# EAGLE board EURO (EAGLE 5.10)
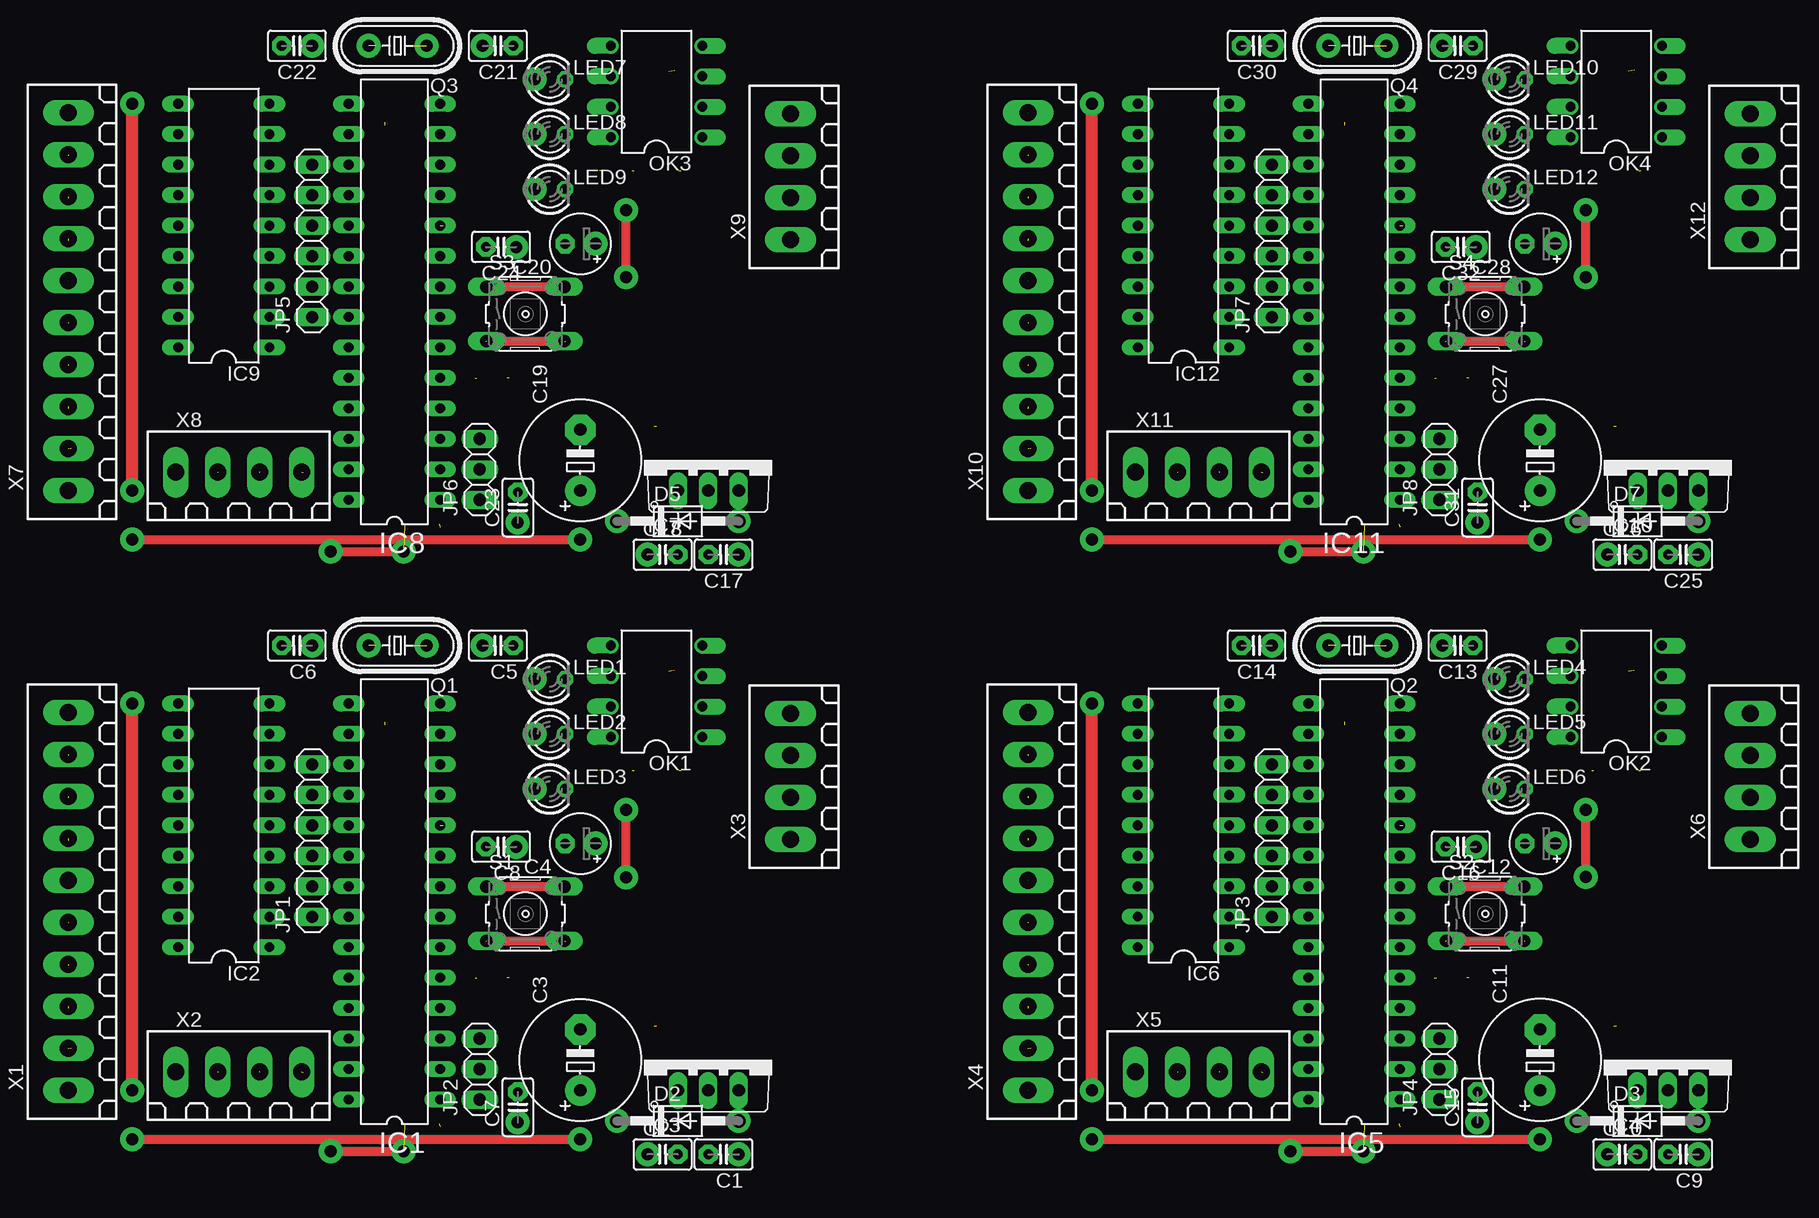
[diagram p0: board, top side]
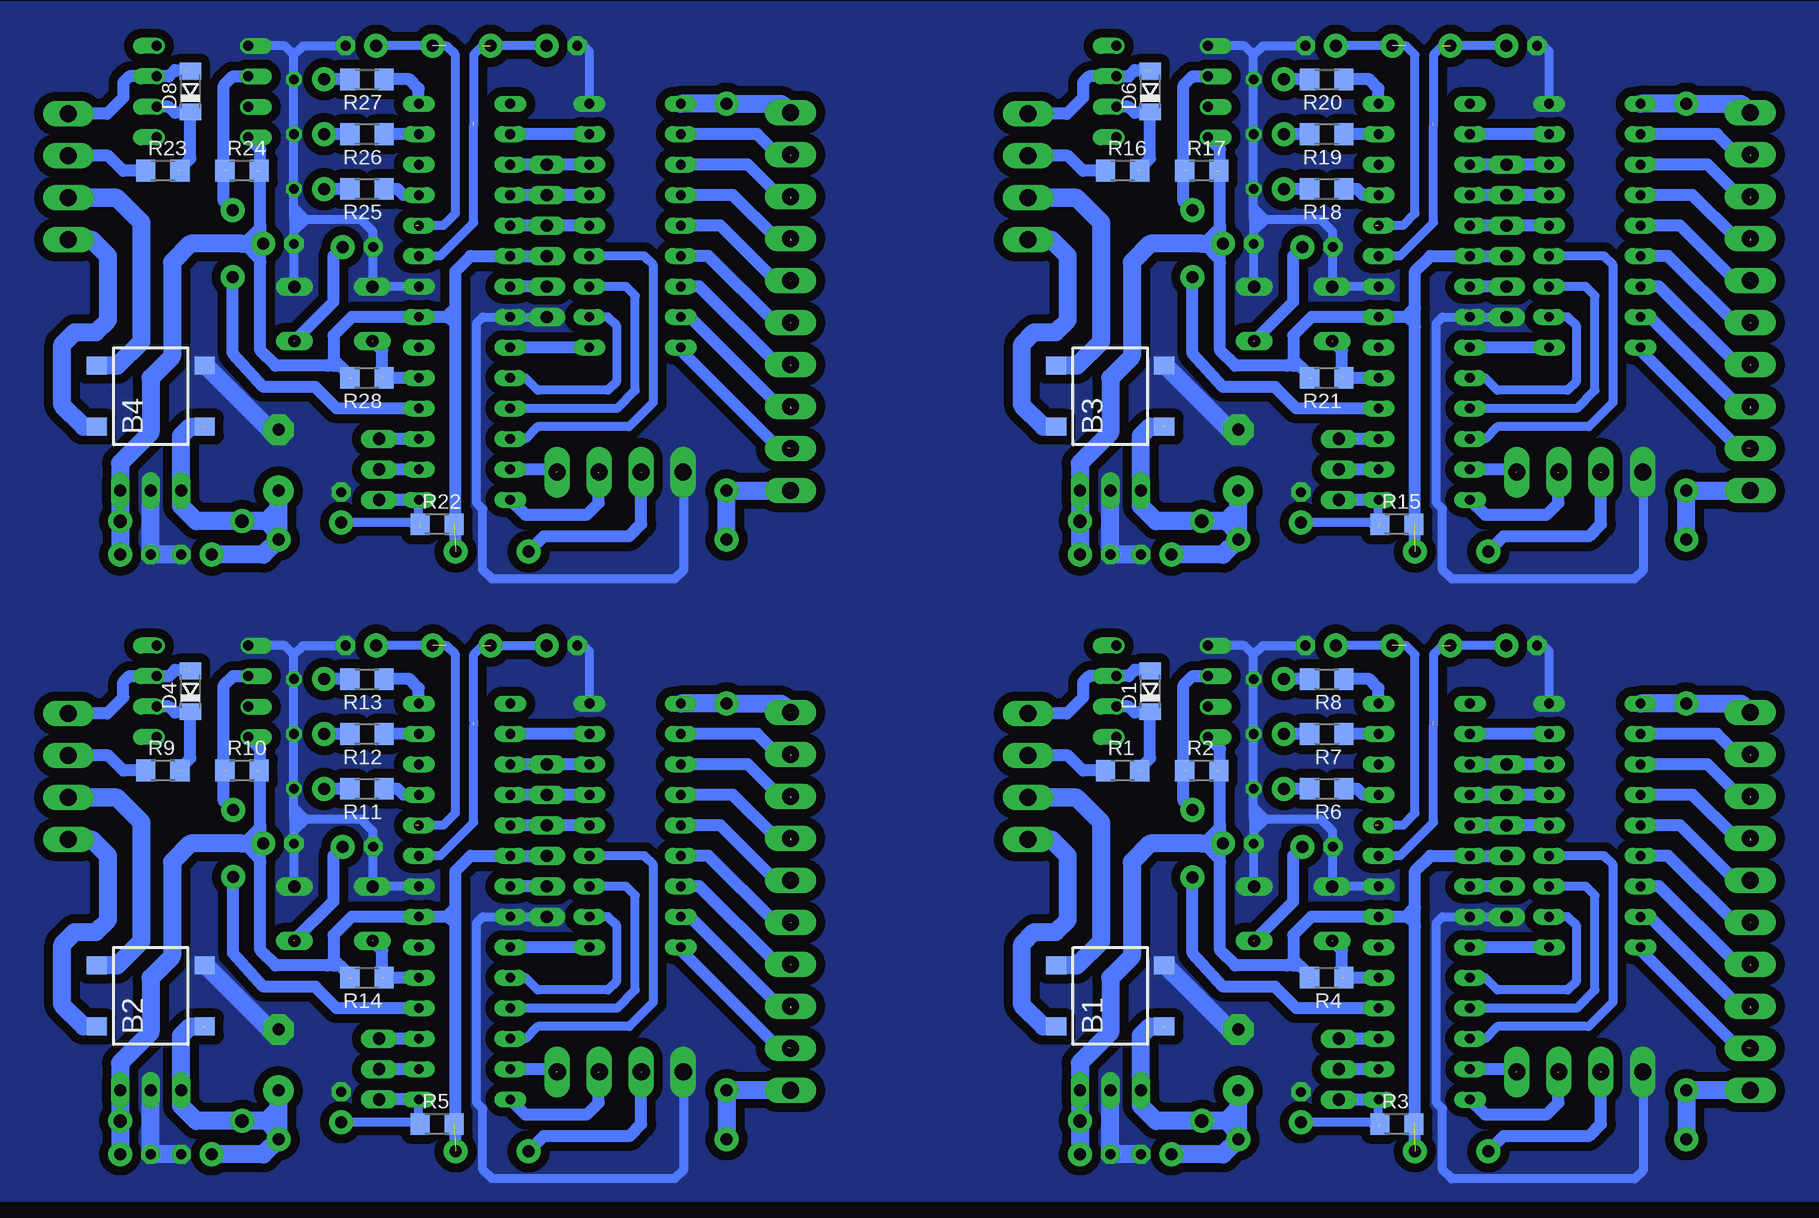
[diagram p1: board, bottom side, seen from below]

No outline drawn. Coordinates in mm, seen from the top.
Copper layers (1*16): Top 0.035mm / dielectric 1.5mm / Bottom 0.035mm
Design rules "default": minimum track width 10mil, minimum drill 24mil, track to track 8mil, track to pad 8mil, pad to pad 8mil, via to via 8mil, smd to smd 8mil, copper to edge 40mil, drill to drill 8mil, minimum pad ring 10mil, minimum via ring 8mil, stop-mask expansion 4mil, vias tented up to drill 0mil, thermal gap 10mil

## Footprints (pad centres in the part's own frame; a part is rotated, then mirrored left to right if it is on the bottom)
B40S = smd 1.5 x 1.7: + -2.55,-4.5; - 2.55,-4.5; AC1 -2.55,4.5; AC2 2.55,4.5
C2.5-2 = drill 0.813 pad 1.6 octagon: 1 -1.27,0; 2 1.27,0
E5-10,5 = drill 1.016 pad 2.54 round: + -2.54,0 | drill 1.016 pad 2.54 octagon: - 2.54,0
E2,5-5 = drill 0.813 pad 1.6 round: + -1.27,0 | drill 0.813 pad 1.6 octagon: - 1.27,0
SOD80C = smd 1.4 x 1.8: A 1.7,0; C -1.7,0
DO41-10 = drill 1.118 round: A 5.08,0; C -5.08,0
DIL28-3 = drill 0.813 long: 1 -16.51,-3.81; 2 -13.97,-3.81; 3 -11.43,-3.81; 4 -8.89,-3.81; 5 -6.35,-3.81; 6 -3.81,-3.81; 7 -1.27,-3.81; 8 1.27,-3.81; 9 3.81,-3.81; 10 6.35,-3.81; 11 8.89,-3.81; 12 11.43,-3.81; 13 13.97,-3.81; 14 16.51,-3.81; 15 16.51,3.81; 16 13.97,3.81; 17 11.43,3.81; 18 8.89,3.81; 19 6.35,3.81; 20 3.81,3.81; 21 1.27,3.81; 22 -1.27,3.81; 23 -3.81,3.81; 24 -6.35,3.81; 25 -8.89,3.81; 26 -11.43,3.81; 27 -13.97,3.81; 28 -16.51,3.81
DIL18 = drill 0.813 long: 1 -10.16,-3.81; 2 -7.62,-3.81; 3 -5.08,-3.81; 4 -2.54,-3.81; 5 0,-3.81; 6 2.54,-3.81; 7 5.08,-3.81; 8 7.62,-3.81; 9 10.16,-3.81; 10 10.16,3.81; 11 7.62,3.81; 12 5.08,3.81; 13 2.54,3.81; 14 0,3.81; 15 -2.54,3.81; 16 -5.08,3.81; 17 -7.62,3.81; 18 -10.16,3.81
TO220V = drill 1.016 long: 1 -2.54,-2.54; 2 0,-2.54; 3 2.54,-2.54
1X06 = drill 1.016 long: 1 -6.35,0; 2 -3.81,0; 3 -1.27,0; 4 1.27,0; 5 3.81,0; 6 6.35,0
1X03 = drill 1.016 long: 1 -2.54,0; 2 0,0; 3 2.54,0
LED3MM = drill 0.813 octagon: A -1.27,0; K 1.27,0
DIL08 = drill 0.813 offset: 1 -3.81,-3.81; 2 -1.27,-3.81; 3 1.27,-3.81; 4 3.81,-3.81; 5 3.81,3.81; 6 1.27,3.81; 7 -1.27,3.81; 8 -3.81,3.81
HC49/S = drill 0.813 round: 1 -2.413,0; 2 2.413,0
R1206 = smd 1.6 x 1.803: 1 -1.422,0; 2 1.422,0
B3F-10XX = drill 1.016 long: 1 -3.251,2.261; 2 3.251,2.261; 3 -3.251,-2.261; 4 3.251,-2.261
180G-10 = drill 1.422 long: 1 -15.75,0; 2 -12.25,0; 3 -8.75,0; 4 -5.25,0; 5 -1.75,0; 6 1.75,0; 7 5.25,0; 8 8.75,0; 9 12.25,0; 10 15.75,0
180G-4 = drill 1.422 long: 1 -5.25,0; 2 -1.75,0; 3 1.75,0; 4 5.25,0

## Placement (x,y rotation side)
B1  B80C800  [B40S]  63.24,17.1 90 bottom
B2  B80C800  [B40S]  143.23,17.1 90 bottom
B3  B80C800  [B40S]  63.24,67.1 90 bottom
B4  B80C800  [B40S]  143.24,67.1 90 bottom
C1  100nF  [C2.5-2]  64.51,3.89 180 top
C2  100nF  [C2.5-2]  59.43,3.89 0 top
C3  470µF 35V  [E5-10,5]  52.57,11.76 90 top
C4  47µF 25V  [E2,5-5]  52.57,29.8 180 top
C5  22pF  [C2.5-2]  45.71,46.31 180 top
C6  22pF  [C2.5-2]  28.95,46.31 180 top
C7  100nF  [C2.5-2]  47.36,7.83 90 top
C8  100nF  [C2.5-2]  45.96,29.54 180 top
C9  100nF  [C2.5-2]  144.5,3.89 180 top
C10  100nF  [C2.5-2]  139.42,3.89 0 top
C11  470µF 35V  [E5-10,5]  132.57,11.77 90 top
C12  47µF 25V  [E2,5-5]  132.57,29.8 180 top
C13  22pF  [C2.5-2]  125.71,46.31 180 top
C14  22pF  [C2.5-2]  108.94,46.31 180 top
C15  100nF  [C2.5-2]  127.36,7.83 90 top
C16  100nF  [C2.5-2]  125.96,29.55 180 top
C17  100nF  [C2.5-2]  64.51,53.89 180 top
C18  100nF  [C2.5-2]  59.43,53.89 0 top
C19  470µF 35V  [E5-10,5]  52.57,61.77 90 top
C20  47µF 25V  [E2,5-5]  52.57,79.8 180 top
C21  22pF  [C2.5-2]  45.71,96.31 180 top
C22  22pF  [C2.5-2]  28.95,96.31 180 top
C23  100nF  [C2.5-2]  47.36,57.83 90 top
C24  100nF  [C2.5-2]  45.96,79.55 180 top
C25  100nF  [C2.5-2]  144.51,53.89 180 top
C26  100nF  [C2.5-2]  139.43,53.89 0 top
C27  470µF 35V  [E5-10,5]  132.57,61.77 90 top
C28  47µF 25V  [E2,5-5]  132.57,79.8 180 top
C29  22pF  [C2.5-2]  125.71,96.31 180 top
C30  22pF  [C2.5-2]  108.95,96.31 180 top
C31  100nF  [C2.5-2]  127.36,57.83 90 top
C32  100nF  [C2.5-2]  125.96,79.55 180 top
D1  1N 4148  [SOD80C]  59.93,42.5 90 bottom
D2  1N4004  [DO41-10]  60.7,6.68 0 top
D3  1N4004  [DO41-10]  140.69,6.69 0 top
D4  1N 4148  [SOD80C]  139.93,42.5 90 bottom
D5  1N4004  [DO41-10]  60.7,56.69 0 top
D6  1N 4148  [SOD80C]  59.93,92.5 90 bottom
D7  1N4004  [DO41-10]  140.7,56.69 0 top
D8  1N 4148  [SOD80C]  139.93,92.5 90 bottom
IC1  Atmega 328P-PU  [DIL28-3]  37.07,24.97 90 top
IC2  ULN2803A  [DIL18]  22.85,31.32 90 top
IC3  µA 7805  [TO220V]  63.24,11.76 0 top
IC4  µA 7805  [TO220V]  143.23,11.77 0 top
IC5  Atmega 328P-PU  [DIL28-3]  117.07,24.97 90 top
IC6  ULN2803A  [DIL18]  102.85,31.32 90 top
IC7  µA 7805  [TO220V]  63.24,61.77 0 top
IC8  Atmega 328P-PU  [DIL28-3]  37.07,74.97 90 top
IC9  ULN2803A  [DIL18]  22.85,81.32 90 top
IC10  µA 7805  [TO220V]  143.24,61.77 0 top
IC11  Atmega 328P-PU  [DIL28-3]  117.07,74.97 90 top
IC12  ULN2803A  [DIL18]  102.85,81.32 90 top
JP1  [1X06]  30.22,30.05 90 top
JP2  [1X03]  44.19,11 90 top
JP3  [1X06]  110.21,30.05 90 top
JP4  [1X03]  124.18,11 90 top
JP5  [1X06]  30.22,80.05 90 top
JP6  [1X03]  44.19,61 90 top
JP7  [1X06]  110.22,80.05 90 top
JP8  [1X03]  124.19,61 90 top
LED1  LED-RT  [LED3MM]  50.03,43.51 0 top
LED2  LED-YE  [LED3MM]  50.03,38.94 0 top
LED3  LED-GN  [LED3MM]  50.03,34.37 0 top
LED4  LED-RT  [LED3MM]  130.03,43.52 0 top
LED5  LED-YE  [LED3MM]  130.03,38.94 0 top
LED6  LED-GN  [LED3MM]  130.03,34.37 0 top
LED7  LED-RT  [LED3MM]  50.03,93.52 0 top
LED8  LED-YE  [LED3MM]  50.03,88.94 0 top
LED9  LED-GN  [LED3MM]  50.03,84.37 0 top
LED10  LED-RT  [LED3MM]  130.03,93.52 0 top
LED11  LED-YE  [LED3MM]  130.03,88.94 0 top
LED12  LED-GN  [LED3MM]  130.03,84.37 0 top
OK1  6N136  [DIL08]  58.92,42.5 90 top
OK2  6N136  [DIL08]  138.92,42.5 90 top
OK3  6N136  [DIL08]  58.92,92.5 90 top
OK4  6N136  [DIL08]  138.92,92.5 90 top
Q1  20 MHz  [HC49/S]  37.33,46.31 180 top
Q2  20 MHz  [HC49/S]  117.33,46.31 180 top
Q3  20 MHz  [HC49/S]  37.33,96.31 180 top
Q4  20 MHz  [HC49/S]  117.33,96.31 180 top
R1  1k5  [R1206]  62.22,35.89 0 bottom
R2  10k  [R1206]  55.62,35.89 0 bottom
R3  10k  [R1206]  39.36,6.43 0 bottom
R4  10k  [R1206]  45.2,18.62 180 bottom
R5  10k  [R1206]  119.36,6.43 0 bottom
R6  1k5  [R1206]  45.2,34.37 180 bottom
R7  1k5  [R1206]  45.2,38.94 180 bottom
R8  1k5  [R1206]  45.2,43.51 180 bottom
R9  1k5  [R1206]  142.22,35.9 0 bottom
R10  10k  [R1206]  135.61,35.9 0 bottom
R11  1k5  [R1206]  125.2,34.37 180 bottom
R12  1k5  [R1206]  125.2,38.94 180 bottom
R13  1k5  [R1206]  125.2,43.52 180 bottom
R14  10k  [R1206]  125.2,18.62 180 bottom
R15  10k  [R1206]  39.36,56.43 0 bottom
R16  1k5  [R1206]  62.22,85.9 0 bottom
R17  10k  [R1206]  55.62,85.9 0 bottom
R18  1k5  [R1206]  45.2,84.37 180 bottom
R19  1k5  [R1206]  45.2,88.94 180 bottom
R20  1k5  [R1206]  45.2,93.52 180 bottom
R21  10k  [R1206]  45.2,68.62 180 bottom
R22  10k  [R1206]  119.36,56.43 0 bottom
R23  1k5  [R1206]  142.22,85.9 0 bottom
R24  10k  [R1206]  135.62,85.9 0 bottom
R25  1k5  [R1206]  125.2,84.37 180 bottom
R26  1k5  [R1206]  125.2,88.94 180 bottom
R27  1k5  [R1206]  125.2,93.52 180 bottom
R28  10k  [R1206]  125.2,68.62 180 bottom
S1  SW  [B3F-10XX]  48,23.96 0 top
S2  SW  [B3F-10XX]  127.99,23.96 0 top
S3  SW  [B3F-10XX]  48,73.96 0 top
S4  SW  [B3F-10XX]  128,73.96 0 top
X1  [180G-10]  9.9,24.97 90 top
X2  [180G-4]  24.09,10.76 0 top
X3  [180G-4]  70.09,35.39 90 top
X4  [180G-10]  89.89,24.97 90 top
X5  [180G-4]  104.09,10.76 0 top
X6  [180G-4]  150.09,35.39 90 top
X7  [180G-10]  9.9,74.97 90 top
X8  [180G-4]  24.09,60.76 0 top
X9  [180G-4]  70.09,85.39 90 top
X10  [180G-10]  89.9,74.97 90 top
X11  [180G-4]  104.09,60.76 0 top
X12  [180G-4]  150.09,85.39 90 top

## Library data of the parts
B1-B4 = rectifier
C1 C2 C5-C10 C13-C18 C21-C26 C29-C32 = capacitor-wima
C3 C4 C11 C12 C19 C20 C27 C28 = resistor
D1-D8 = diode
IC1 IC5 IC8 IC11 = avr-6
IC2 IC6 IC9 IC12 = uln-udn
IC3 IC4 IC7 IC10 = linear
JP1-JP8 = pinhead
LED1-LED12 = led
OK1-OK4 = optocoupler
Q1-Q4 = crystal
R1-R28 = rcl
S1-S4 = switch-omron
X1-X12 = con-weidmueller-sl35

## Nets
+5V: C1.1 C4.+ D2.A IC1.7 IC1.20 IC3.3 JP1.3 OK1.8 R2.2 R3.2 R4.2 X2.2
+5V1: C9.1 C12.+ D3.A IC4.3 IC5.7 IC5.20 JP3.3 OK2.8 R5.2 R10.2 R14.2 X5.2
+5V2: C17.1 C20.+ D5.A IC7.3 IC8.7 IC8.20 JP5.3 OK3.8 R15.2 R17.2 R21.2 X8.2
+5V3: C25.1 C28.+ D7.A IC10.3 IC11.7 IC11.20 JP7.3 OK4.8 R22.2 R24.2 R28.2 X11.2
+16V: B1.+ C2.1 C3.+ D2.C IC2.10 IC3.1 X1.1 X1.10
+16V1: B2.+ C10.1 C11.+ D3.C IC4.1 IC6.10 X4.1 X4.10
+16V2: B3.+ C18.1 C19.+ D5.C IC7.1 IC9.10 X7.1 X7.10
+16V3: B4.+ C26.1 C27.+ D7.C IC10.1 IC12.10 X10.1 X10.10
AC-0: B1.AC2 X3.2
AC-1: B2.AC2 X6.2
AC-2: B3.AC2 X9.2
AC-3: B4.AC2 X12.2
AC-L: B1.AC1 X3.1
AC-L1: B2.AC1 X6.1
AC-L2: B3.AC1 X9.1
AC-L3: B4.AC1 X12.1
AREF: IC1.21 JP1.2
AREF1: IC5.21 JP3.2
AREF2: IC8.21 JP5.2
AREF3: IC11.21 JP7.2
DCC-AVR: IC1.4 OK1.6 R2.1
DCC-AVR1: IC5.4 OK2.6 R10.1
DCC-AVR2: IC8.4 OK3.6 R17.1
DCC-AVR3: IC11.4 OK4.6 R24.1
DCC-SIG-1: R1.1 X3.3
DCC-SIG-2: D1.A OK1.3 X3.4
DCC-SIG-3: D4.A OK2.3 X6.4
DCC-SIG-4: R9.1 X6.3
DCC-SIG-5: D6.A OK3.3 X9.4
DCC-SIG-6: R16.1 X9.3
DCC-SIG-7: D8.A OK4.3 X12.4
DCC-SIG-8: R23.1 X12.3
GND: B1.- C1.2 C2.2 C3.- C4.- C5.1 C6.2 C7.2 C8.2 IC1.8 IC1.22 IC2.9 IC3.2 JP1.1 LED1.K LED2.K LED3.K OK1.5 S1.1 S1.2 X2.1
GND1: B2.- C9.2 C10.2 C11.- C12.- C13.1 C14.2 C15.2 C16.2 IC4.2 IC5.8 IC5.22 IC6.9 JP3.1 LED4.K LED5.K LED6.K OK2.5 S2.1 S2.2 X5.1
GND2: B3.- C17.2 C18.2 C19.- C20.- C21.1 C22.2 C23.2 C24.2 IC7.2 IC8.8 IC8.22 IC9.9 JP5.1 LED7.K LED8.K LED9.K OK3.5 S3.1 S3.2 X8.1
GND3: B4.- C25.2 C26.2 C27.- C28.- C29.1 C30.2 C31.2 C32.2 IC10.2 IC11.8 IC11.22 IC12.9 JP7.1 LED10.K LED11.K LED12.K OK4.5 S4.1 S4.2 X11.1
LED-GREEN: IC1.11 R6.1
LED-GREEN1: IC5.11 R11.1
LED-GREEN2: IC8.11 R18.1
LED-GREEN3: IC11.11 R25.1
LED-RED: IC1.14 R8.1
LED-RED1: IC5.14 R13.1
LED-RED2: IC8.14 R20.1
LED-RED3: IC11.14 R27.1
LED-YELLOW: IC1.13 R7.1
LED-YELLOW1: IC5.13 R12.1
LED-YELLOW2: IC8.13 R19.1
LED-YELLOW3: IC11.13 R26.1
MODE-SW: C8.1 IC1.5 R4.1 S1.3 S1.4
MODE-SW1: C16.1 IC5.5 R14.1 S2.3 S2.4
MODE-SW2: C24.1 IC8.5 R21.1 S3.3 S3.4
MODE-SW3: C32.1 IC11.5 R28.1 S4.3 S4.4
N$1: LED1.A R8.2
N$2: LED4.A R13.2
N$3: LED2.A R7.2
N$4: LED3.A R6.2
N$5: LED5.A R12.2
N$7: D1.C OK1.2 R1.2
N$8: LED6.A R11.2
N$11: D4.C OK2.2 R9.2
N$15: LED7.A R20.2
N$16: LED8.A R19.2
N$17: LED9.A R18.2
N$19: D6.C OK3.2 R16.2
N$22: LED10.A R27.2
N$23: LED11.A R26.2
N$24: LED12.A R25.2
N$26: D8.C OK4.2 R23.2
OUTPUT-1: IC2.18 X1.2
OUTPUT-2: IC2.17 X1.3
OUTPUT-3: IC2.16 X1.4
OUTPUT-4: IC2.15 X1.5
OUTPUT-5: IC2.14 X1.6
OUTPUT-6: IC2.13 X1.7
OUTPUT-7: IC2.12 X1.8
OUTPUT-8: IC2.11 X1.9
OUTPUT-9: IC6.18 X4.2
OUTPUT-10: IC6.17 X4.3
OUTPUT-11: IC6.16 X4.4
OUTPUT-12: IC6.15 X4.5
OUTPUT-13: IC6.14 X4.6
OUTPUT-14: IC6.13 X4.7
OUTPUT-15: IC6.12 X4.8
OUTPUT-16: IC6.11 X4.9
OUTPUT-17: IC9.18 X7.2
OUTPUT-18: IC9.17 X7.3
OUTPUT-19: IC9.16 X7.4
OUTPUT-20: IC9.15 X7.5
OUTPUT-21: IC9.14 X7.6
OUTPUT-22: IC9.13 X7.7
OUTPUT-23: IC9.12 X7.8
OUTPUT-24: IC9.11 X7.9
OUTPUT-25: IC12.18 X10.2
OUTPUT-26: IC12.17 X10.3
OUTPUT-27: IC12.16 X10.4
OUTPUT-28: IC12.15 X10.5
OUTPUT-29: IC12.14 X10.6
OUTPUT-30: IC12.13 X10.7
OUTPUT-31: IC12.12 X10.8
OUTPUT-32: IC12.11 X10.9
PWM-1: IC1.23 IC2.1
PWM-2: IC1.24 IC2.2
PWM-3: IC1.25 IC2.3
PWM-4: IC1.26 IC2.4
PWM-5: IC1.19 IC2.5 JP1.4
PWM-6: IC1.18 IC2.6 JP1.5
PWM-7: IC1.17 IC2.7 JP1.6
PWM-8: IC1.16 IC2.8
PWM-9: IC5.16 IC6.8
PWM-10: IC5.17 IC6.7 JP3.6
PWM-11: IC5.18 IC6.6 JP3.5
PWM-12: IC5.19 IC6.5 JP3.4
PWM-13: IC5.23 IC6.1
PWM-14: IC5.24 IC6.2
PWM-15: IC5.25 IC6.3
PWM-16: IC5.26 IC6.4
PWM-17: IC8.16 IC9.8
PWM-18: IC8.17 IC9.7 JP5.6
PWM-19: IC8.18 IC9.6 JP5.5
PWM-20: IC8.19 IC9.5 JP5.4
PWM-21: IC8.23 IC9.1
PWM-22: IC8.24 IC9.2
PWM-23: IC8.25 IC9.3
PWM-24: IC8.26 IC9.4
PWM-25: IC11.16 IC12.8
PWM-26: IC11.17 IC12.7 JP7.6
PWM-27: IC11.18 IC12.6 JP7.5
PWM-28: IC11.19 IC12.5 JP7.4
PWM-29: IC11.23 IC12.1
PWM-30: IC11.24 IC12.2
PWM-31: IC11.25 IC12.3
PWM-32: IC11.26 IC12.4
RESET: C7.1 IC1.1 JP2.1 R3.1
RESET1: C15.1 IC5.1 JP4.1 R5.1
RESET2: C23.1 IC8.1 JP6.1 R15.1
RESET3: C31.1 IC11.1 JP8.1 R22.1
RX: IC1.2 JP2.2
RX1: IC5.2 JP4.2
RX2: IC8.2 JP6.2
RX3: IC11.2 JP8.2
SCL: IC1.28 X2.3
SCL1: IC5.28 X5.3
SCL2: IC8.28 X8.3
SCL3: IC11.28 X11.3
SDA: IC1.27 X2.4
SDA1: IC5.27 X5.4
SDA2: IC8.27 X8.4
SDA3: IC11.27 X11.4
TX: IC1.3 JP2.3
TX1: IC5.3 JP4.3
TX2: IC8.3 JP6.3
TX3: IC11.3 JP8.3
XTAL1: C6.1 IC1.9 Q1.2
XTAL2: C5.2 IC1.10 Q1.1
XTAL3: C13.2 IC5.10 Q2.1
XTAL4: C14.1 IC5.9 Q2.2
XTAL5: C21.2 IC8.10 Q3.1
XTAL6: C22.1 IC8.9 Q3.2
XTAL7: C29.2 IC11.10 Q4.1
XTAL8: C30.1 IC11.9 Q4.2

## Tracks (layer width: path | path; a pad name or v marks a point on that pad's centre or on a via)
+5V  (via drill 1 pad 2)  (4 unrouted)
  Top 0.75: v31.74,4.14 v37.84,4.14
  Bottom 0.75: 37.84,22.94 38.6,23.7 | IC1.20 33.26,29.04 | 54.09,29.55 C4.+ 54.09,30.05 | 48,19.64 48,20.15 48.5,19.64 | 54.09,35.64 54.09,36.66 54.35,36.4 | 54.09,35.64 54.09,35.39 54.6,35.9 | 54.09,35.64 54.35,35.9 | 54.09,28.27 55.62,29.8 54.09,31.32
  Bottom 1: JP1.3 IC1.20 36.57,28.78 37.84,27.51 37.84,24.46 | 37.84,24.46 38.6,23.7 IC1.7 46.47,23.7 48,22.18 48,20.15 47.49,19.64 | 37.84,24.46 37.84,22.94 v37.84,4.14 | X2.2 22.34,6.43 23.36,5.42 30.47,5.42 v31.74,4.14 | 47.49,19.64 48,19.64 48.5,19.64 52.82,19.64 54.09,20.91 54.09,28.27 54.09,29.55 | 47.49,19.64 46.47,18.62 | OK1.8 54.09,37.67 54.09,36.66 | 54.09,30.05 54.09,31.32 54.09,35.39
  Bottom 1.5: C1.1 D2.A IC3.3 65.78,11.51 63.24,14.05 63.24,18.62 61.46,20.4 61.46,28.27 59.93,29.8 55.62,29.8 C4.+
  other vias: 65.78,3.89 65.78,6.68 53.84,29.8
+5V1  (via drill 1 pad 2)  (4 unrouted)
  Top 0.75: v111.74,4.15 v117.83,4.15
  Bottom 0.75: 117.83,22.94 118.6,23.7 | IC5.20 113.26,29.04 | 134.09,29.55 C12.+ 134.09,30.05 | 128,19.64 128,20.15 128.5,19.64 | 134.09,35.64 134.09,36.66 134.34,36.4 | 134.09,35.64 134.09,35.39 134.6,35.9 | 134.09,35.64 134.34,35.9 | 134.09,28.28 135.62,29.8 134.09,31.32
  Bottom 1: JP3.3 IC5.20 116.56,28.78 117.83,27.51 117.83,24.47 | 117.83,24.47 118.6,23.7 IC5.7 126.47,23.7 128,22.18 128,20.15 127.49,19.64 | 117.83,24.47 117.83,22.94 v117.83,4.15 | X5.2 102.34,6.43 103.36,5.42 110.47,5.42 v111.74,4.15 | 127.49,19.64 128,19.64 128.5,19.64 132.82,19.64 134.09,20.91 134.09,28.28 134.09,29.55 | 127.49,19.64 126.47,18.62 | OK2.8 134.09,37.67 134.09,36.66 | 134.09,30.05 134.09,31.32 134.09,35.39
  Bottom 1.5: C9.1 D3.A IC4.3 145.78,11.51 143.24,14.05 143.24,18.62 141.46,20.4 141.46,28.28 139.93,29.8 135.62,29.8 C12.+
  other vias: 145.77,3.89 145.77,6.69 133.84,29.8
+5V2  (via drill 1 pad 2)  (4 unrouted)
  Top 0.75: v31.74,54.15 v37.84,54.15
  Bottom 0.75: 37.84,72.94 38.6,73.7 | IC8.20 33.26,79.04 | 54.09,79.55 C20.+ 54.09,80.05 | 48,69.64 48,70.15 48.5,69.64 | 54.09,85.64 54.09,86.66 54.35,86.4 | 54.09,85.64 54.09,85.39 54.6,85.89 | 54.09,85.64 54.35,85.89 | 54.09,78.28 55.62,79.8 54.09,81.32
  Bottom 1: JP5.3 IC8.20 36.57,78.78 37.84,77.51 37.84,74.47 | 37.84,74.47 38.6,73.7 IC8.7 46.47,73.7 48,72.18 48,70.15 47.49,69.64 | 37.84,74.47 37.84,72.94 v37.84,54.15 | X8.2 22.34,56.43 23.36,55.41 30.47,55.41 v31.74,54.15 | 47.49,69.64 48,69.64 48.5,69.64 52.82,69.64 54.09,70.91 54.09,78.28 54.09,79.55 | 47.49,69.64 46.47,68.62 | OK3.8 54.09,87.67 54.09,86.66 | 54.09,80.05 54.09,81.32 54.09,85.39
  Bottom 1.5: C17.1 D5.A IC7.3 65.78,61.51 63.24,64.05 63.24,68.62 61.46,70.4 61.46,78.28 59.93,79.8 55.62,79.8 C20.+
  other vias: 65.78,53.89 65.78,56.69 53.84,79.8
+5V3  (via drill 1 pad 2)  (4 unrouted)
  Top 0.75: v111.74,54.15 v117.84,54.15
  Bottom 0.75: 117.84,72.94 118.6,73.7 | IC11.20 113.26,79.04 | 134.09,79.55 C28.+ 134.09,80.05 | 128,69.64 128,70.15 128.5,69.64 | 134.09,85.64 134.09,86.66 134.35,86.4 | 134.09,85.64 134.09,85.39 134.6,85.89 | 134.09,85.64 134.35,85.89 | 134.09,78.28 135.62,79.8 134.09,81.32
  Bottom 1: JP7.3 IC11.20 116.57,78.78 117.84,77.51 117.84,74.47 | 117.84,74.47 118.6,73.7 IC11.7 126.47,73.7 128,72.18 128,70.15 127.49,69.64 | 117.84,74.47 117.84,72.94 v117.84,54.15 | X11.2 102.34,56.43 103.36,55.41 110.47,55.41 v111.74,54.15 | 127.49,69.64 128,69.64 128.5,69.64 132.82,69.64 134.09,70.91 134.09,78.28 134.09,79.55 | 127.49,69.64 126.47,68.62 | OK4.8 134.09,87.67 134.09,86.66 | 134.09,80.05 134.09,81.32 134.09,85.39
  Bottom 1.5: C25.1 D7.A IC10.3 145.78,61.51 143.24,64.05 143.24,68.62 141.46,70.4 141.46,78.28 139.93,79.8 135.62,79.8 C28.+
  other vias: 145.78,53.89 145.78,56.69 133.84,79.8
+16V  (via drill 1 pad 2)  (3 unrouted)
  Top 0.75: v15.23,5.16 v52.57,5.16
  Top 1: v15.23,9.22 v15.23,41.48
  Bottom 1.5: IC2.10 v15.23,41.48 10.66,41.48 X1.10 | X1.1 v15.23,9.22 v15.23,5.16 | 58.92,14.56 59.93,14.56 60.7,13.8 IC3.1 60.7,7.96 59.43,6.68 D2.C 53.58,6.68 | 52.57,5.67 v52.57,5.16 53.84,3.89 C2.1 | 52.57,5.67 52.57,6.68 | 52.57,6.68 52.57,7.7 | 52.57,7.7 C3.+ | 52.57,6.68 53.58,6.68 | 53.58,6.68 52.57,7.7 | 52.57,5.67 53.58,6.68
  other vias: 58.16,3.89 55.62,6.68
+16V1  (via drill 1 pad 2)  (3 unrouted)
  Top 0.75: v95.23,5.16 v132.57,5.16
  Top 1: v95.23,9.23 v95.23,41.48
  Bottom 1.5: IC6.10 v95.23,41.48 90.66,41.48 X4.10 | X4.1 v95.23,9.23 v95.23,5.16 | 138.92,14.56 139.93,14.56 140.69,13.8 IC4.1 140.69,7.96 139.43,6.69 D3.C 133.58,6.69 | 132.57,5.67 v132.57,5.16 133.84,3.89 C10.1 | 132.57,5.67 132.57,6.69 | 132.57,6.69 132.57,7.7 | 132.57,7.7 C11.+ | 132.57,6.69 133.58,6.69 | 133.58,6.69 132.57,7.7 | 132.57,5.67 133.58,6.69
  other vias: 138.15,3.89 135.61,6.69
+16V2  (via drill 1 pad 2)  (3 unrouted)
  Top 0.75: v15.23,55.16 v52.57,55.16
  Top 1: v15.23,59.23 v15.23,91.48
  Bottom 1.5: IC9.10 v15.23,91.48 10.66,91.48 X7.10 | X7.1 v15.23,59.23 v15.23,55.16 | 58.92,64.56 59.93,64.56 60.7,63.8 IC7.1 60.7,57.95 59.43,56.69 D5.C 53.58,56.69 | 52.57,55.67 v52.57,55.16 53.84,53.89 C18.1 | 52.57,55.67 52.57,56.69 | 52.57,56.69 52.57,57.7 | 52.57,57.7 C19.+ | 52.57,56.69 53.58,56.69 | 53.58,56.69 52.57,57.7 | 52.57,55.67 53.58,56.69
  other vias: 58.16,53.89 55.62,56.69
+16V3  (via drill 1 pad 2)  (3 unrouted)
  Top 0.75: v95.23,55.16 v132.57,55.16
  Top 1: v95.23,59.23 v95.23,91.48
  Bottom 1.5: IC12.10 v95.23,91.48 90.66,91.48 X10.10 | X10.1 v95.23,59.23 v95.23,55.16 | 138.92,64.56 139.93,64.56 140.7,63.8 IC10.1 140.7,57.95 139.43,56.69 D7.C 133.58,56.69 | 132.57,55.67 v132.57,55.16 133.84,53.89 C26.1 | 132.57,55.67 132.57,56.69 | 132.57,56.69 132.57,57.7 | 132.57,57.7 C27.+ | 132.57,56.69 133.58,56.69 | 133.58,56.69 132.57,57.7 | 132.57,55.67 133.58,56.69
  other vias: 138.16,53.89 135.62,56.69
AC-0
  Bottom 1.5: X3.2 66.06,33.64 64,31.58 64,21.67 66.03,19.64 67.73,19.64 B1.AC2
AC-1
  Bottom 1.5: X6.2 146.06,33.64 144,31.58 144,21.67 146.03,19.64 B2.AC2
AC-2
  Bottom 1.5: X9.2 66.06,83.64 64,81.58 64,71.67 66.03,69.64 67.73,69.64 B3.AC2
AC-3
  Bottom 1.5: X12.2 146.06,83.64 144,81.58 144,71.67 146.03,69.64 147.73,69.64 B4.AC2
AC-L
  Bottom 1.5: X3.1 68.15,30.14 66.79,28.78 66.79,23.45 67.81,22.43 69.59,22.43 70.6,21.42 70.6,16.34 68.82,14.56 B1.AC1
AC-L1
  Bottom 1.5: X6.1 148.15,30.14 146.79,28.78 146.79,23.45 147.81,22.43 149.59,22.43 150.6,21.42 150.6,16.34 148.82,14.56 147.75,14.56 B2.AC1
AC-L2
  Bottom 1.5: X9.1 68.15,80.14 66.79,78.78 66.79,73.45 67.81,72.43 69.59,72.43 70.6,71.42 70.6,66.34 68.82,64.56 B3.AC1
AC-L3
  Bottom 1.5: X12.1 148.15,80.14 146.79,78.78 146.79,73.45 147.81,72.43 149.59,72.43 150.6,71.42 150.6,66.34 148.82,64.56 B4.AC1
AREF
  Bottom 1: JP1.2 IC1.21
AREF1
  Bottom 1: JP3.2 IC5.21
AREF2
  Bottom 1: JP5.2 IC8.21
AREF3
  Bottom 1: JP7.2 IC11.21
DCC-AVR  (via drill 1 pad 2)  (1 unrouted)
  Top 0.75: v56.38,27 v56.38,32.59
  Bottom 0.75: 56.89,36.4 57.14,36.15 57.14,35.64 56.89,35.9
  Bottom 1: IC1.4 47.74,16.08 49.52,17.86 53.84,17.86 56.38,20.66 v56.38,27 | 57.14,36.15 57.14,43.01 56.38,43.77 OK1.6 | 57.14,35.64 57.14,33.35 v56.38,32.59
DCC-AVR1  (via drill 1 pad 2)  (1 unrouted)
  Top 0.75: v136.38,27.01 v136.38,32.59
  Bottom 0.75: 136.88,36.4 137.14,36.15 137.14,35.64 136.88,35.9
  Bottom 1: IC5.4 127.74,16.08 129.52,17.86 133.84,17.86 136.38,20.66 v136.38,27.01 | 137.14,36.15 137.14,43.01 136.38,43.77 OK2.6 | 137.14,35.64 137.14,33.36 v136.38,32.59
DCC-AVR2  (via drill 1 pad 2)  (1 unrouted)
  Top 0.75: v56.38,77 v56.38,82.59
  Bottom 0.75: 56.89,86.4 57.14,86.15 57.14,85.64 56.89,85.89
  Bottom 1: IC8.4 47.74,66.08 49.52,67.86 53.84,67.86 56.38,70.66 v56.38,77 | 57.14,86.15 57.14,93.01 56.38,93.77 OK3.6 | 57.14,85.64 57.14,83.36 v56.38,82.59
DCC-AVR3  (via drill 1 pad 2)  (1 unrouted)
  Top 0.75: v136.38,77 v136.38,82.59
  Bottom 0.75: 136.89,86.4 137.14,86.15 137.14,85.64 136.89,85.89
  Bottom 1: IC11.4 127.74,66.08 129.52,67.86 133.84,67.86 136.38,70.66 v136.38,77 | 137.14,86.15 137.14,93.01 136.38,93.77 OK4.6 | 137.14,85.64 137.14,83.36 v136.38,82.59
DCC-SIG-1
  Bottom 1: X3.3 66.76,37.14 65.52,35.9 R1.1
DCC-SIG-2  (1 unrouted)
  Bottom 1: 60.44,44.28 61.2,44.28 61.71,43.77 OK1.3 65.01,43.77 65.52,43.26 65.52,41.99 66.88,40.64 X3.4
DCC-SIG-3  (1 unrouted)
  Bottom 1: 140.44,44.28 141.2,44.28 141.71,43.77 OK2.3 145.01,43.77 145.52,43.26 145.52,41.99 146.88,40.64 X6.4
DCC-SIG-4
  Bottom 1: X6.3 146.76,37.14 145.52,35.9 R9.1
DCC-SIG-5  (1 unrouted)
  Bottom 1: 60.44,94.28 61.2,94.28 61.71,93.77 OK3.3 65.01,93.77 65.52,93.26 65.52,91.99 66.88,90.64 X9.4
DCC-SIG-6
  Bottom 1: X9.3 66.76,87.14 65.52,85.89 R16.1
DCC-SIG-7  (1 unrouted)
  Bottom 1: 140.44,94.28 141.2,94.28 141.71,93.77 OK4.3 145.01,93.77 145.52,93.26 145.52,91.99 146.88,90.64 X12.4
DCC-SIG-8
  Bottom 1: X12.3 146.76,87.14 145.52,85.89 R23.1
GND
  Bottom 0.75: JP1.1 IC1.22 35.55,23.7 36.06,23.2 36.06,8.21 35.55,7.7 35.55,2.62 34.79,1.86 19.55,1.86 18.79,2.62 18.79,10.75 | C5.1 50.54,46.31 51.3,45.55 | 51.3,45.55 LED1.K LED2.K LED3.K 51.3,32.85 | IC2.9 26.66,45.8 27.17,46.31 C6.2 | 51.3,30.82 51.3,26.24 | 51.3,31.83 51.3,30.82 | 51.3,31.83 51.3,32.85 | IC1.8 44.69,26.24 C8.2 44.69,30.82 45.71,31.83 50.28,31.83 | 50.28,31.83 51.3,31.83 | 50.28,31.83 51.3,30.82 | 50.28,31.83 51.3,32.85 | 51.3,45.55 52.06,46.31 OK1.5
  Bottom 1.5: 58.66,19.64 53.33,14.3 C3.- | C2.2 C1.2 IC3.2
  pour Bottom (isolate 0.75, no thermals): -0.01,-0.01 -0.01,49.99 79.99,49.99 79.99,-0.01
GND1
  Bottom 0.75: JP3.1 IC5.22 115.55,23.7 116.06,23.2 116.06,8.21 115.55,7.7 115.55,2.62 114.79,1.86 99.55,1.86 98.78,2.62 98.78,10.75 | C13.1 130.53,46.31 131.3,45.55 | 131.3,45.55 LED4.K LED5.K LED6.K 131.3,32.85 | IC6.9 106.66,45.8 107.17,46.31 C14.2 | 131.3,30.82 131.3,26.24 | 131.3,31.83 131.3,30.82 | 131.3,31.83 131.3,32.85 | IC5.8 124.69,26.24 C16.2 124.69,30.82 125.71,31.83 130.28,31.83 | 130.28,31.83 131.3,31.83 | 130.28,31.83 131.3,30.82 | 130.28,31.83 131.3,32.85 | 131.3,45.55 132.06,46.31 OK2.5
  Bottom 1.5: 138.66,19.64 133.33,14.31 C11.- | C10.2 C9.2 IC4.2
  pour Bottom (isolate 0.75, no thermals): 79.99,-0.01 79.99,49.99 159.99,49.99 159.99,-0.01
GND2
  Bottom 0.75: JP5.1 IC8.22 35.55,73.7 36.06,73.19 36.06,58.21 35.55,57.7 35.55,52.62 34.79,51.86 19.55,51.86 18.79,52.62 18.79,60.75 | C21.1 50.54,96.31 51.3,95.55 | 51.3,95.55 LED7.K LED8.K LED9.K 51.3,82.85 | IC9.9 26.66,95.8 27.17,96.31 C22.2 | 51.3,80.81 51.3,76.24 | 51.3,81.83 51.3,80.81 | 51.3,81.83 51.3,82.85 | IC8.8 44.69,76.24 C24.2 44.69,80.81 45.71,81.83 50.28,81.83 | 50.28,81.83 51.3,81.83 | 50.28,81.83 51.3,80.81 | 50.28,81.83 51.3,82.85 | 51.3,95.55 52.06,96.31 OK3.5
  Bottom 1.5: 58.66,69.64 53.33,64.31 C19.- | C18.2 C17.2 IC7.2
  pour Bottom (isolate 0.75, no thermals): -0.01,49.99 -0.01,99.99 79.99,99.99 79.99,49.99
GND3
  Bottom 0.75: JP7.1 IC11.22 115.55,73.7 116.06,73.19 116.06,58.21 115.55,57.7 115.55,52.62 114.79,51.86 99.55,51.86 98.79,52.62 98.79,60.75 | C29.1 130.54,96.31 131.3,95.55 | 131.3,95.55 LED10.K LED11.K LED12.K 131.3,82.85 | IC12.9 106.66,95.8 107.17,96.31 C30.2 | 131.3,80.81 131.3,76.24 | 131.3,81.83 131.3,80.81 | 131.3,81.83 131.3,82.85 | IC11.8 124.69,76.24 C32.2 124.69,80.81 125.71,81.83 130.28,81.83 | 130.28,81.83 131.3,81.83 | 130.28,81.83 131.3,80.81 | 130.28,81.83 131.3,82.85 | 131.3,95.55 132.06,96.31 OK4.5
  Bottom 1.5: 138.66,69.64 133.33,64.31 C27.- | C26.2 C25.2 IC10.2
  pour Bottom (isolate 0.75, no thermals): 79.99,49.99 79.99,99.99 159.99,99.99 159.99,49.99
LED-GREEN
  Bottom 1: R6.1 42.66,34.37 42.15,33.86 IC1.11
LED-GREEN1
  Bottom 1: R11.1 122.66,34.37 122.15,33.86 IC5.11
LED-GREEN2
  Bottom 1: R18.1 42.66,84.37 42.15,83.86 IC8.11
LED-GREEN3
  Bottom 1: R25.1 122.66,84.37 122.15,83.86 IC11.11
LED-RED
  Bottom 1: R8.1 41.65,43.52 40.88,42.75 IC1.14
LED-RED1
  Bottom 1: R13.1 121.64,43.52 120.88,42.75 IC5.14
LED-RED2
  Bottom 1: R20.1 41.65,93.52 40.88,92.75 IC8.14
LED-RED3
  Bottom 1: R27.1 121.65,93.52 120.88,92.75 IC11.14
LED-YELLOW
  Bottom 1: IC1.13 R7.1
LED-YELLOW1
  Bottom 1: IC5.13 R12.1
LED-YELLOW2
  Bottom 1: IC8.13 R19.1
LED-YELLOW3
  Bottom 1: IC11.13 R26.1
MODE-SW  (via drill 1 pad 2)  (3 unrouted)
  Top 0.75: S1.3 S1.4
  Bottom 1: IC1.5 43.93,18.62 43.93,20.91 44.69,21.67 | 51.3,21.67 48,24.97 48,28.78 C8.1
  other vias: 47.23,29.54
MODE-SW1  (via drill 1 pad 2)  (3 unrouted)
  Top 0.75: S2.3 S2.4
  Bottom 1: IC5.5 123.93,18.62 123.93,20.91 124.69,21.67 | 131.3,21.67 128,24.97 128,28.78 C16.1
  other vias: 127.23,29.55
MODE-SW2  (via drill 1 pad 2)  (3 unrouted)
  Top 0.75: S3.3 S3.4
  Bottom 1: IC8.5 43.93,68.62 43.93,70.91 44.69,71.67 | 51.3,71.67 48,74.97 48,78.78 C24.1
  other vias: 47.23,79.55
MODE-SW3  (via drill 1 pad 2)  (3 unrouted)
  Top 0.75: S4.3 S4.4
  Bottom 1: IC11.5 123.93,68.62 123.93,70.91 124.69,71.67 | 131.3,71.67 128,74.97 128,78.78 C32.1
  other vias: 127.23,79.55
N$1  (via drill 1 pad 2)
  Bottom 1: R8.2 LED1.A
  other vias: 48.76,43.51
N$2  (via drill 1 pad 2)
  Bottom 1: R13.2 LED4.A
  other vias: 128.76,43.52
N$3  (via drill 1 pad 2)
  Bottom 1: R7.2 LED2.A
  other vias: 48.76,38.94
N$4  (via drill 1 pad 2)
  Bottom 1: R6.2 LED3.A
  other vias: 48.76,34.37
N$5  (via drill 1 pad 2)
  Bottom 1: R12.2 LED5.A
  other vias: 128.76,38.94
N$6
  Bottom 0.75: 62.98,43.77 64,43.77
N$7  (1 unrouted)
  Bottom 0.75: 60.52,40.72 D1.C 60.44,40.72 | 59.93,40.72 59.93,40.98
  Bottom 1: OK1.2 61.71,41.23 61.2,40.72 60.52,40.72 59.93,40.72 59.93,36.91 60.95,35.9
N$8  (via drill 1 pad 2)
  Bottom 1: R11.2 LED6.A
  other vias: 128.76,34.37
N$9
  Top 0.75: 44.69,26.24 51.3,26.24
N$10
  Bottom 0.75: 142.98,43.77 144,43.77
N$11  (1 unrouted)
  Bottom 0.75: 140.52,40.72 D4.C 140.44,40.72 | 139.93,40.72 139.93,40.98
  Bottom 1: OK2.2 141.71,41.23 141.2,40.72 140.52,40.72 139.93,40.72 139.93,36.91 140.95,35.9
N$12
  Top 0.75: 124.69,26.24 131.3,26.24
N$13
  Bottom 1.5: 67.81,19.64 66.03,19.64 64,21.67 64,31.58 66.03,33.61 68.57,33.61
N$14
  Bottom 1.5: 147.81,19.64 146.03,19.64 144,21.67 144,31.58 146.03,33.61 148.57,33.61
N$15  (via drill 1 pad 2)
  Bottom 1: R20.2 LED7.A
  other vias: 48.76,93.52
N$16  (via drill 1 pad 2)
  Bottom 1: R19.2 LED8.A
  other vias: 48.76,88.94
N$17  (via drill 1 pad 2)
  Bottom 1: R18.2 LED9.A
  other vias: 48.76,84.37
N$18
  Bottom 0.75: 62.98,93.77 64,93.77
N$19  (1 unrouted)
  Bottom 0.75: 60.52,90.72 D6.C 60.44,90.72 | 59.93,90.72 59.93,90.97
  Bottom 1: OK3.2 61.71,91.23 61.2,90.72 60.52,90.72 59.93,90.72 59.93,86.91 60.95,85.89
N$20
  Top 0.75: 44.69,76.24 51.3,76.24
N$21
  Bottom 1.5: 67.81,69.64 66.03,69.64 64,71.67 64,81.58 66.03,83.61 68.57,83.61
N$22  (via drill 1 pad 2)
  Bottom 1: R27.2 LED10.A
  other vias: 128.76,93.52
N$23  (via drill 1 pad 2)
  Bottom 1: R26.2 LED11.A
  other vias: 128.76,88.94
N$24  (via drill 1 pad 2)
  Bottom 1: R25.2 LED12.A
  other vias: 128.76,84.37
N$25
  Bottom 0.75: 142.98,93.77 144,93.77
N$26  (1 unrouted)
  Bottom 0.75: 140.52,90.72 D8.C 140.44,90.72 | 139.93,90.72 139.93,90.97
  Bottom 1: OK4.2 141.71,91.23 141.2,90.72 140.52,90.72 139.93,90.72 139.93,86.91 140.95,85.89
N$27
  Top 0.75: 124.69,76.24 131.3,76.24
N$28
  Bottom 1.5: 147.81,69.64 146.03,69.64 144,71.67 144,81.58 146.03,83.61 148.57,83.61
OUTPUT-1  (1 unrouted)
  Bottom 1: 10.15,12.78 10.91,12.78 19.04,20.91 IC2.18
OUTPUT-2  (1 unrouted)
  Bottom 1: IC2.17 18.28,23.7 10.91,16.34 10.15,16.34 9.9,16.08
OUTPUT-3  (1 unrouted)
  Bottom 1: IC2.16 17.52,26.24 11.17,19.89 10.15,19.89 9.9,19.64
OUTPUT-4  (1 unrouted)
  Bottom 1: IC2.15 16.75,28.78 11.17,23.2 9.9,23.2
OUTPUT-5  (1 unrouted)
  Bottom 1: IC2.14 15.74,31.32 11.17,26.75 9.9,26.75
OUTPUT-6  (1 unrouted)
  Bottom 1: IC2.13 14.72,33.86 11.17,30.31 10.15,30.31 9.9,30.05
OUTPUT-7  (1 unrouted)
  Bottom 1: IC2.12 13.45,36.4 10.91,33.86 10.15,33.86 9.9,33.61
OUTPUT-8  (1 unrouted)
  Bottom 1: IC2.11 12.69,38.94 10.91,37.16 9.9,37.16
OUTPUT-9  (1 unrouted)
  Bottom 1: 90.15,12.78 90.91,12.78 99.04,20.91 IC6.18
OUTPUT-10  (1 unrouted)
  Bottom 1: IC6.17 98.28,23.7 90.91,16.34 90.15,16.34 89.89,16.08
OUTPUT-11  (1 unrouted)
  Bottom 1: IC6.16 97.52,26.24 91.17,19.89 90.15,19.89 89.89,19.64
OUTPUT-12  (1 unrouted)
  Bottom 1: IC6.15 96.75,28.78 91.17,23.2 89.89,23.2
OUTPUT-13  (1 unrouted)
  Bottom 1: IC6.14 95.74,31.32 91.17,26.75 89.89,26.75
OUTPUT-14  (1 unrouted)
  Bottom 1: IC6.13 94.72,33.86 91.17,30.31 90.15,30.31 89.89,30.05
OUTPUT-15  (1 unrouted)
  Bottom 1: IC6.12 93.45,36.4 90.91,33.86 90.15,33.86 89.89,33.61
OUTPUT-16  (1 unrouted)
  Bottom 1: IC6.11 92.69,38.94 90.91,37.17 89.89,37.17
OUTPUT-17  (1 unrouted)
  Bottom 1: 10.15,62.78 10.91,62.78 19.04,70.91 IC9.18
OUTPUT-18  (1 unrouted)
  Bottom 1: IC9.17 18.28,73.7 10.91,66.34 10.15,66.34 9.9,66.08
OUTPUT-19  (1 unrouted)
  Bottom 1: IC9.16 17.52,76.24 11.17,69.89 10.15,69.89 9.9,69.64
OUTPUT-20  (1 unrouted)
  Bottom 1: IC9.15 16.75,78.78 11.17,73.19 9.9,73.19
OUTPUT-21  (1 unrouted)
  Bottom 1: IC9.14 15.74,81.32 11.17,76.75 9.9,76.75
OUTPUT-22  (1 unrouted)
  Bottom 1: IC9.13 14.72,83.86 11.17,80.31 10.15,80.31 9.9,80.05
OUTPUT-23  (1 unrouted)
  Bottom 1: IC9.12 13.45,86.4 10.91,83.86 10.15,83.86 9.9,83.61
OUTPUT-24  (1 unrouted)
  Bottom 1: IC9.11 12.69,88.94 10.91,87.17 9.9,87.17
OUTPUT-25  (1 unrouted)
  Bottom 1: 90.15,62.78 90.91,62.78 99.04,70.91 IC12.18
OUTPUT-26  (1 unrouted)
  Bottom 1: IC12.17 98.28,73.7 90.91,66.34 90.15,66.34 89.9,66.08
OUTPUT-27  (1 unrouted)
  Bottom 1: IC12.16 97.52,76.24 91.17,69.89 90.15,69.89 89.9,69.64
OUTPUT-28  (1 unrouted)
  Bottom 1: IC12.15 96.75,78.78 91.17,73.19 89.9,73.19
OUTPUT-29  (1 unrouted)
  Bottom 1: IC12.14 95.74,81.32 91.17,76.75 89.9,76.75
OUTPUT-30  (1 unrouted)
  Bottom 1: IC12.13 94.72,83.86 91.17,80.31 90.15,80.31 89.9,80.05
OUTPUT-31  (1 unrouted)
  Bottom 1: IC12.12 93.45,86.4 90.91,83.86 90.15,83.86 89.9,83.61
OUTPUT-32  (1 unrouted)
  Bottom 1: IC12.11 92.69,88.94 90.91,87.17 89.9,87.17
PWM-1
  Bottom 1: IC2.1 IC1.23
PWM-2
  Bottom 0.75: IC2.2 25.14,23.7 24.37,22.94 24.37,18.37 25.14,17.61 30.98,17.61 31.99,18.62 IC1.24
PWM-3
  Bottom 0.75: IC1.25 24.37,16.08 22.85,17.61 22.85,25.48 23.61,26.24 IC2.3
PWM-4
  Bottom 0.75: IC2.4 22.09,28.78 21.33,28.02 21.33,16.59 23.36,14.56 30.98,14.56 31.99,13.54 IC1.26
PWM-5
  Bottom 1: IC1.19 JP1.4 IC2.5
PWM-6
  Bottom 1: IC1.18 JP1.5 IC2.6
PWM-7
  Bottom 1: IC1.17 JP1.6 IC2.7
PWM-8
  Bottom 1: IC2.8 IC1.16
PWM-9
  Bottom 1: IC6.8 IC5.16
PWM-10
  Bottom 1: IC5.17 JP3.6 IC6.7
PWM-11
  Bottom 1: IC5.18 JP3.5 IC6.6
PWM-12
  Bottom 1: IC5.19 JP3.4 IC6.5
PWM-13
  Bottom 1: IC6.1 IC5.23
PWM-14
  Bottom 0.75: IC6.2 105.14,23.7 104.37,22.94 104.37,18.37 105.14,17.61 110.98,17.61 111.99,18.62 IC5.24
PWM-15
  Bottom 0.75: IC5.25 104.37,16.08 102.85,17.61 102.85,25.48 103.61,26.24 IC6.3
PWM-16
  Bottom 0.75: IC6.4 102.09,28.78 101.33,28.02 101.33,16.59 103.36,14.56 110.98,14.56 111.99,13.54 IC5.26
PWM-17
  Bottom 1: IC9.8 IC8.16
PWM-18
  Bottom 1: IC8.17 JP5.6 IC9.7
PWM-19
  Bottom 1: IC8.18 JP5.5 IC9.6
PWM-20
  Bottom 1: IC8.19 JP5.4 IC9.5
PWM-21
  Bottom 1: IC9.1 IC8.23
PWM-22
  Bottom 0.75: IC9.2 25.14,73.7 24.37,72.94 24.37,68.37 25.14,67.61 30.98,67.61 31.99,68.62 IC8.24
PWM-23
  Bottom 0.75: IC8.25 24.37,66.08 22.85,67.61 22.85,75.48 23.61,76.24 IC9.3
PWM-24
  Bottom 0.75: IC9.4 22.09,78.78 21.33,78.02 21.33,66.59 23.36,64.56 30.98,64.56 31.99,63.54 IC8.26
PWM-25
  Bottom 1: IC12.8 IC11.16
PWM-26
  Bottom 1: IC11.17 JP7.6 IC12.7
PWM-27
  Bottom 1: IC11.18 JP7.5 IC12.6
PWM-28
  Bottom 1: IC11.19 JP7.4 IC12.5
PWM-29
  Bottom 1: IC12.1 IC11.23
PWM-30
  Bottom 0.75: IC12.2 105.14,73.7 104.37,72.94 104.37,68.37 105.14,67.61 110.98,67.61 111.99,68.62 IC11.24
PWM-31
  Bottom 0.75: IC11.25 104.37,66.08 102.85,67.61 102.85,75.48 103.61,76.24 IC12.3
PWM-32
  Bottom 0.75: IC12.4 102.09,78.78 101.33,78.02 101.33,66.59 103.36,64.56 110.98,64.56 111.99,63.54 IC11.26
RESET  (via drill 1 pad 2)  (1 unrouted)
  Bottom 0.75: 40.88,6.18 IC1.1 | C7.1 41.39,6.56 41.39,6.43 R3.1
  Bottom 1: IC1.1 JP2.1
  other vias: 47.36,6.56
RESET1  (via drill 1 pad 2)  (1 unrouted)
  Bottom 0.75: 120.88,6.18 IC5.1 | C15.1 121.39,6.56 121.39,6.43 R5.1
  Bottom 1: IC5.1 JP4.1
  other vias: 127.36,6.56
RESET2  (via drill 1 pad 2)  (1 unrouted)
  Bottom 0.75: 40.88,56.18 IC8.1 | C23.1 41.39,56.56 41.39,56.43 R15.1
  Bottom 1: IC8.1 JP6.1
  other vias: 47.36,56.56
RESET3  (via drill 1 pad 2)  (1 unrouted)
  Bottom 0.75: 120.88,56.18 IC11.1 | C31.1 121.39,56.56 121.39,56.43 R22.1
  Bottom 1: IC11.1 JP8.1
  other vias: 127.36,56.56
RX
  Bottom 1: IC1.2 JP2.2
RX1
  Bottom 1: IC5.2 JP4.2
RX2
  Bottom 1: IC8.2 JP6.2
RX3
  Bottom 1: IC11.2 JP8.2
SCL  (1 unrouted)
  Bottom 1: 25.9,10.75 25.9,8.21 26.91,7.19 31.99,7.19 IC1.28
SCL1  (1 unrouted)
  Bottom 1: 105.9,10.75 105.9,8.21 106.91,7.19 111.99,7.19 IC5.28
SCL2  (1 unrouted)
  Bottom 1: 25.9,60.75 25.9,58.21 26.91,57.19 31.99,57.19 IC8.28
SCL3  (1 unrouted)
  Bottom 1: 105.9,60.75 105.9,58.21 106.91,57.19 111.99,57.19 IC11.28
SDA  (1 unrouted)
  Bottom 1: IC1.27 29.71,11 29.45,10.75
SDA1  (1 unrouted)
  Bottom 1: IC5.27 109.71,11 109.45,10.75
SDA2  (1 unrouted)
  Bottom 1: IC8.27 29.71,61 29.45,60.75
SDA3  (1 unrouted)
  Bottom 1: IC11.27 109.71,61 109.45,60.75
TX
  Bottom 1: IC1.3 JP2.3
TX1
  Bottom 1: IC5.3 JP4.3
TX2
  Bottom 1: IC8.3 JP6.3
TX3
  Bottom 1: IC11.3 JP8.3
XTAL1  (via drill 1 pad 2)  (2 unrouted)
  Bottom 0.75: IC1.9 39.11,28.78 36.31,31.58 36.31,39.7 | 36.31,39.96 36.31,45.55 35.55,46.31 C6.1
  other vias: 34.91,46.31 30.22,46.31
XTAL2  (via drill 1 pad 2)  (2 unrouted)
  Bottom 0.75: 41.14,31.32 38.85,31.32 37.84,32.34 37.84,45.55 38.6,46.31 C5.2
  other vias: 39.74,46.31 44.44,46.31
XTAL3  (via drill 1 pad 2)  (2 unrouted)
  Bottom 0.75: 121.14,31.32 118.85,31.32 117.83,32.34 117.83,45.55 118.6,46.31 C13.2
  other vias: 119.74,46.31 124.44,46.31
XTAL4  (via drill 1 pad 2)  (2 unrouted)
  Bottom 0.75: IC5.9 119.11,28.78 116.31,31.58 116.31,39.71 | 116.31,39.96 116.31,45.55 115.55,46.31 C14.1
  other vias: 114.91,46.31 110.21,46.31
XTAL5  (via drill 1 pad 2)  (2 unrouted)
  Bottom 0.75: 41.14,81.32 38.85,81.32 37.84,82.34 37.84,95.55 38.6,96.31 C21.2
  other vias: 39.74,96.31 44.44,96.31
XTAL6  (via drill 1 pad 2)  (2 unrouted)
  Bottom 0.75: IC8.9 39.11,78.78 36.31,81.58 36.31,89.7 | 36.31,89.96 36.31,95.55 35.55,96.31 C22.1
  other vias: 34.91,96.31 30.22,96.31
XTAL7  (via drill 1 pad 2)  (2 unrouted)
  Bottom 0.75: 121.14,81.32 118.85,81.32 117.84,82.34 117.84,95.55 118.6,96.31 C29.2
  other vias: 119.74,96.31 124.44,96.31
XTAL8  (via drill 1 pad 2)  (2 unrouted)
  Bottom 0.75: IC11.9 119.11,78.78 116.31,81.58 116.31,89.7 | 116.31,89.96 116.31,95.55 115.55,96.31 C30.1
  other vias: 114.91,96.31 110.22,96.31